# Altium PCB PX4FLOW2.0_X0.PcbDoc (part 2 of 2)
Units mm, origin at the board's own origin, x right, y up, seen from the top; angles counter-clockwise.
Board outline 45.39 x 35 mm, 6 copper layers (Top, Signal Layer 1, Signal Layer 2, Route2, Route15, Bottom), stack 1.474 mm thick; 104 components, 102 nets, 463 pads, 304 vias.
Unrouted connection lines stored in the file: 8.
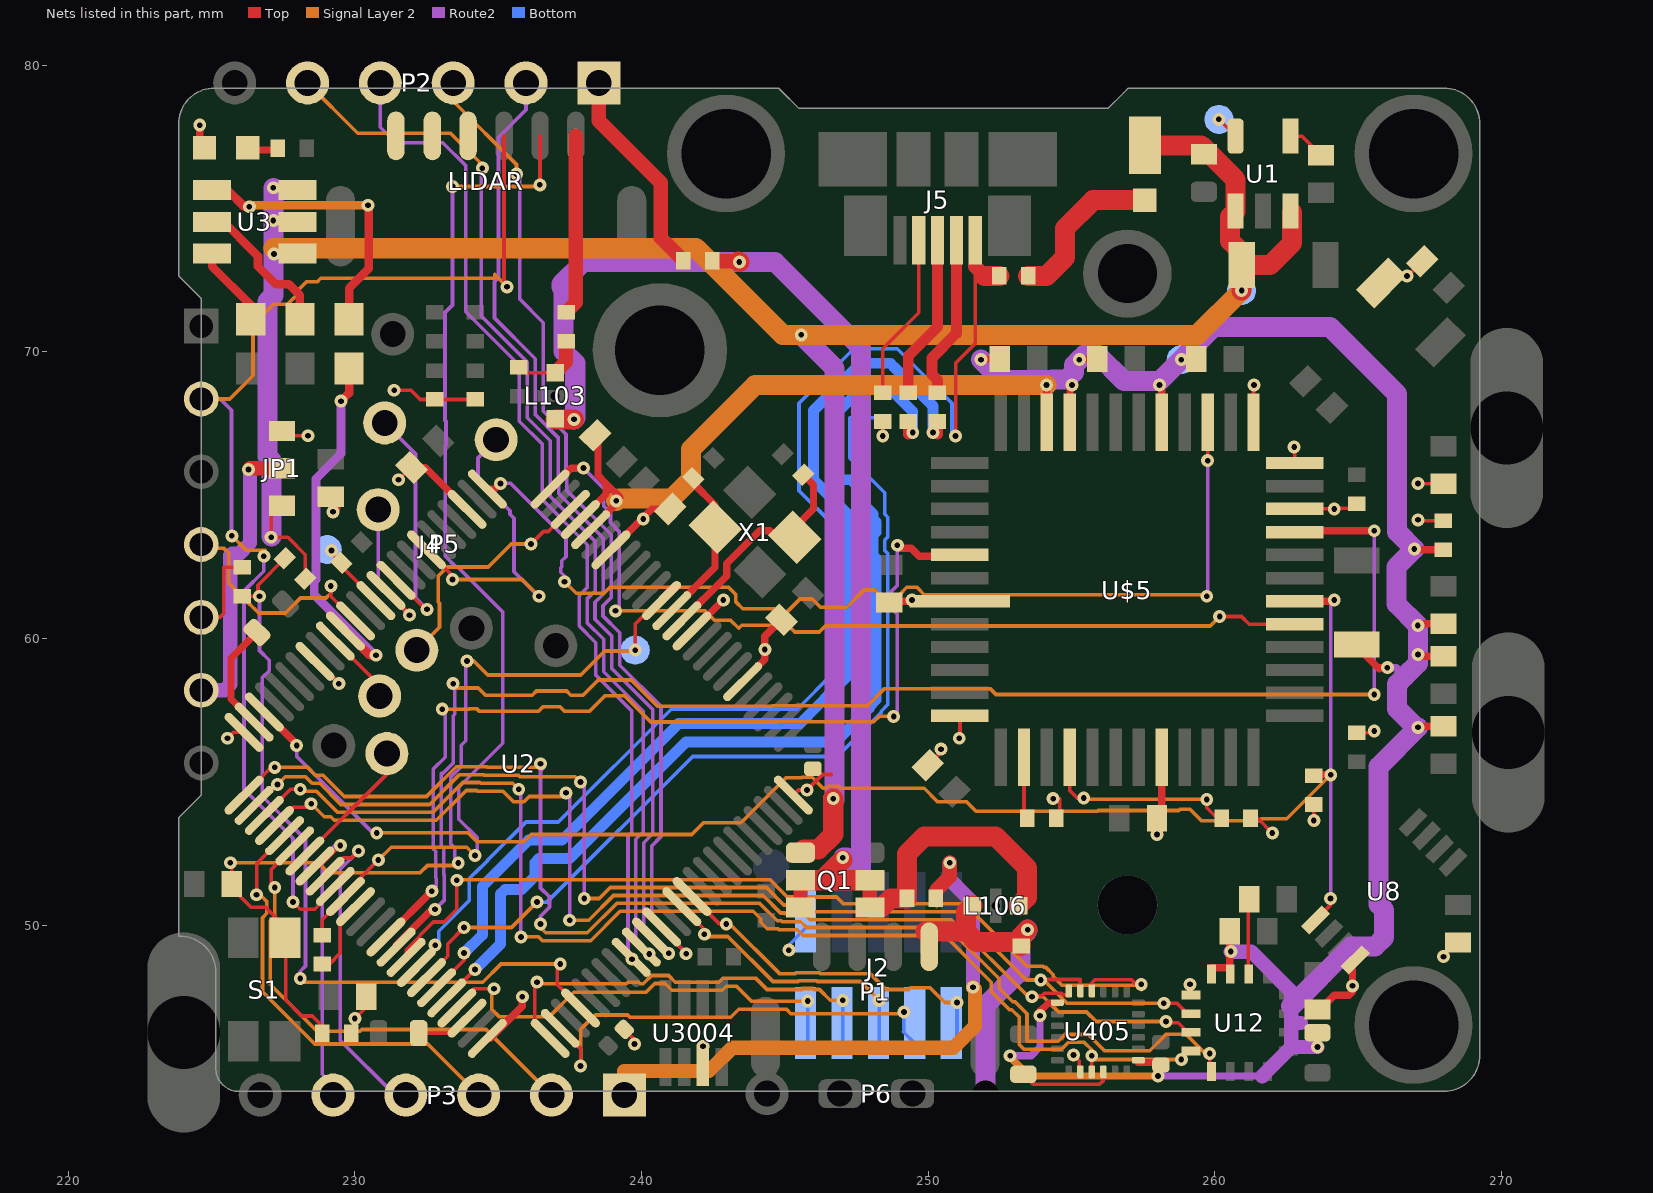
[diagram p6: the nets of this part, all layers, seen from the top]

## Via types
v1: diameter 0.45, hole 0.2, Top to Bottom, tented both sides, 304 vias

## Nets (pads, with @x,y where several pads share a name; then routed paths per layer and width w, separated by ;. In a path a pad name is that pad's centre, name@x,y a point inside that pad or via, vN(x,y) a via of type N, cw(c..) or ccw(c..) an arc to the next point about the centre after c; other vN are vias at no path point) (continued)
I2C2_SDA: R2.1 U2.48 U8.5 U$5.24 | length 55.1
  Top w0.127: U8.5@263.506,50.175 264.033,50.702 v1(264.033,50.927)
  Top w0.254: U2.48@226.838,57.429 227.965,56.302 v1(227.965,56.261) ; U$5.24@262.786,61.297 264.116,61.297 v1(264.16,61.341) ; R2.1@263.449,55.212 263.476,55.239 v1(264.039,55.239)
  Route2 w0.127: v1(227.965,56.261) 227.965,55.88 230.632,53.213 v1(230.759,53.213) ; v1(264.033,50.927) 264.039,50.933 v1(264.039,55.239) 264.039,61.22 v1(264.16,61.341)
  Signal Layer 2 w0.127: v1(230.759,53.213) 233.949,53.213 234.26,52.901 235.894,52.901 236.148,53.156 241.746,53.156 242.157,53.566 243.467,53.566 245.043,55.142 245.581,55.142 245.589,55.15 245.952,55.15 246.331,54.772 246.429,54.772 246.503,54.845 246.866,54.845 246.94,54.772 249.855,54.772 250.323,54.303 251.333,54.303 251.668,53.968 255.905,53.968 255.93,53.994 258.733,53.994 258.771,54.033 259.135,54.033 259.527,53.64 261.55,53.64 261.614,53.704 262.504,53.704 v1(264.039,55.239)
J\T\R\S\T\: J2.10 U2.90 | length 12.4
  Top w0.127: U2.90@241.758,50.994 242.714,50.038 v1(242.951,50.038)
  Signal Layer 2 w0.127: v1(242.951,50.038) 243.078,50.038 244.81,48.306 245.353,48.306 245.385,48.338 246.207,48.338 246.239,48.306 247.97,48.306 248.526,47.751 249.314,47.751 249.373,47.81 250.062,47.81 250.576,47.295 v1(251.003,47.295)
  Bottom w0.127: J2.10@250.825,45.847 251.003,46.025 v1(251.003,47.295)
JTCK-SWCLK: J2.4 U2.76 | length 15.1
  Top w0.127: v1(236.347,48.006) 236.278,47.937 236.278,46.575 U2.76@236.808,46.045
  Signal Layer 2 w0.127: v1(236.347,48.006) 236.405,47.948 239.469,47.948 239.524,48.004 239.895,48.004 239.95,47.948 240.053,47.948 240.343,48.239 240.936,48.239 241.169,48.006 242.701,48.006 242.832,48.137 243.988,48.137 244.373,47.752 245.582,47.752 245.614,47.784 245.977,47.784 246.01,47.752 246.202,47.752 246.583,47.371 v1(247.015,47.371)
  Bottom w0.127: J2.4@247.015,45.847 v1(247.015,47.371)
JTDI: J2.8 U2.77 | length 15.9
  Top w0.127: U2.77@237.162,46.398 237.871,45.689 v1(237.871,45.085)
  Signal Layer 2 w0.127: v1(237.871,45.085) 237.871,46.355 238.379,46.863 239.511,46.863 239.594,46.78 243.107,46.78 243.389,47.061 245.052,47.061 245.206,46.907 249.091,46.907 v1(249.149,46.965)
  Bottom w0.127: v1(249.149,46.965) 249.149,46.304 249.123,46.279 J2.8@249.555,45.847
JTDO: J2.6 U2.89 | length 9.9
  Top w0.127: U2.89@241.404,50.641 242.189,49.856 v1(242.189,49.677)
  Signal Layer 2 w0.127: v1(242.189,49.677) 242.267,49.599 243.009,49.599 244.579,48.029 245.467,48.029 245.499,48.061 246.092,48.061 246.124,48.029 247.627,48.029 v1(248.285,47.371)
  Bottom w0.127: J2.6@248.285,45.847 v1(248.285,47.371)
JTMS-SWDIO: J2.2 U2.72 | length 15.9
  Top w0.127: U2.72@233.555,47.105 234.024,47.575 234.024,47.662 234.14,47.777 v1(234.848,47.777)
  Signal Layer 2 w0.127: v1(234.848,47.777) 234.765,47.694 234.765,47.062 235.022,46.805 236.783,46.805 237.634,47.657 240.153,47.657 240.458,47.962 240.821,47.962 241.054,47.729 242.816,47.729 242.947,47.86 243.31,47.86 243.825,47.346 v1(245.796,47.346)
  Bottom w0.127: J2.2@245.745,45.847 245.796,45.898 v1(245.796,47.346)
M\P\U\_\C\S\: U2.67 U405.22 | length 31.5
  Top w0.127: U2.67@231.788,48.873 231.788,49.137 232.278,49.627 232.278,49.652 232.733,50.107 233.114,50.107 233.553,50.546 v1(233.553,51.562) ; U405.22@255.705,47.625 U405.22@255.705,47.701 255.705,47.984 255.814,48.093 257.088,48.093 257.226,47.955 v1@257.429,47.955
  Signal Layer 2 w0.127: v1(233.553,51.562) 233.575,51.584 244.467,51.584 245.077,50.975 246.807,50.975 247.04,50.742 251.264,50.742 253.441,48.565 254,48.565 254.044,48.521 254.105,48.521 254.362,48.264 254.362,48.202 254.663,47.902 257.279,47.902 257.429,47.752 v1(257.429,47.93)
MAG_DRDY---: P5.2 U2.36 | length 5.3
  Top w0.127: U2.36@231.08,61.672 231.902,60.85 v1(231.902,60.808)
  Route2 w0.127: P5.2@230.81,64.491 230.81,61.9 v1(231.902,60.808)
NetC3_P$1: C3.P$1 U2.12 X1.3 | length 8.2
  Top w0.254: U2.12@241.404,60.611 242.967,62.174 242.967,62.611 244.11,63.754 244.475,63.754 244.705,63.524 X1.3@245.343,63.524 245.343,63.86 245.999,64.516 245.999,65.354 C3.P$1@245.641,65.712
NetC4_P$2: C4.P$2 U2.13 X1.1 | length 5.6
  Top w0.254: U2.13@241.051,60.965 242.563,62.477 X1.1@242.563,63.88 242.563,64.65 241.804,65.409 C4.P$2@241.804,65.579
NetC11_P$1: C11.P$1 U2.73 | length 1.9
  Top w0.127: C11.P$1@232.221,46.228 233.385,46.228 U2.73@233.909,46.752
NetC12_P$1: C12.P$1 U2.49 | length 3.8
  Top w0.254: U2.49@226.484,57.076 225.679,57.881 225.679,59.309 C12.P$1@226.581,60.211
NetC13_1: C13.1 U1.4 | length 1.3
  Top w0.127: U1.4@262.636,77.521 263.032,77.521 C13.1@263.703,76.85
NetC25_1: C25.1 U12.14 | length 2.3
  Top w0.127: U12.14@261.158,48.512 C25.1@261.158,50.861
NetD1_ANODE: D1.ANODE L8.1 | length 5.8
  Top w0.7: L8.1@253.484,72.644 254.127,72.644 254.762,73.279 254.762,74.295 255.753,75.286 D1.ANODE@257.556,75.286
NetD104_C: D104.C L2.1 L103.P$2 | length 2.3
  Top w0.127: D104.C@235.907,69.266 L103.P$2@236.982,69.266
  Top w0.5: L103.P$2@236.982,69.266 237.363,69.647 L2.1@237.363,70.366
NetD108_C: D108.C L106.P$2 P1.1 P6.1 | length 11.3
  Top w0.127: D108.C@253.23,49.276 D108.C@253.238,49.268
  Top w0.7: P1.1@249.906,49.773 251.319,49.773 ; L106.P$2@251.536,50.673 251.319,50.455 251.319,49.773 ; D108.C@253.086,49.403 251.689,49.403 251.319,49.773 ; D108.C@253.238,49.268 253.238,49.606 v1(253.467,49.835)
  Route2 w0.7: P6.1@251.993,44.12 251.993,47.191 253.213,48.41 253.213,49.555 253.467,49.809 v1(253.467,49.835)
NetL2_2: L2.2 LIDAR.6 | length 6.3
  Top w0.5: L2.2@237.363,71.374 237.704,71.715 237.704,77.528
NetL3_2: L3.2 P2.1 | length 7.4
  Top w0.5: P2.1@238.506,79.375 238.506,78.054 240.665,75.895 240.665,73.965 L3.2@241.452,73.177
NetLED1_C: LED1.C R13.2 | length 0.7
  Top w0.254: LED1.C@226.39,77.038 227.051,77.038
NetR14_1: R14.1 U3.C3 | length 10
  Top w0.3: 225.017,75.641 225.552,75.641 226.136,75.057 v1(226.314,75.057) ; R14.1@229.794,71.132 229.794,72.212 230.48,72.898 230.48,75.082 v1(230.454,75.108)
  Signal Layer 2 w0.3: v1(226.314,75.057) 226.365,75.108 v1(230.454,75.108)
NetR15_1: R15.1 U3.C2 | length 5
  Top w0.3: U3.C2@225.271,74.678 226.619,73.33 226.619,72.974 227.234,72.359 227.692,72.359 228.079,71.971 R15.1@228.079,71.132
NetR17_1: R17.1 U3.C1 | length 2.9
  Top w0.3: 225.017,73.424 225.017,72.976 226.365,71.628 R17.1@226.365,71.132
NetR19_1: R19.1 U$5.8 | length 2.1
  Top w0.127: R19.1@253.34,53.761 U$5.8@253.34,55.857
NetR20_1: R20.1 U$5.10 | length 6.9
  Top w0.127: U$5.10@254.94,55.857 254.94,54.686 255.194,54.432 v1(255.422,54.432) ; v1(259.715,54.381) 259.715,54.087 R20.1@260.081,53.721
  Signal Layer 2 w0.127: v1(255.422,54.432) v1@255.473,54.432 ; v1@255.473,54.381 v1(259.715,54.381)
OTG_FS_ID: R7.2 U2.69 | length 33.5
  Top w0.127: U2.69@232.495,48.166 233.238,48.91 233.238,49.337 233.236,49.34 v1(233.807,49.911) ; v1(248.412,67.056) R7.2@248.412,67.564
  Signal Layer 2 w0.127: v1(233.807,49.911) 235.458,49.911 v1(236.347,50.8)
  Bottom w0.127: v1@236.22,50.8 v1(236.347,50.8) ; v1@236.347,50.658 v1(236.347,50.8) ; v1(248.412,67.056) 248.412,67.691 247.269,67.691 247.269,66.294 248.481,65.082 248.481,64.334 248.587,64.228 248.587,63.534 248.481,63.428 248.481,63.064 248.587,62.958 248.587,57.692 248.354,57.459 248.354,57.41 246.824,55.88 241.783,55.88 236.703,50.8 v1(236.347,50.8)
OTG_FS_N: R6.2 U2.70 | length 36.8
  Top w0.127: U2.70@232.848,47.812 233.807,48.771 v1(233.807,49.022)
  Top w0.381: v1(250.161,67.183) 250.253,67.183 250.317,67.12 R6.2@250.317,67.564
  Bottom w0.381: v1(233.807,49.022) 234.442,49.657 234.442,51.342 236.059,52.959 237.227,52.959 241.291,57.023 245.516,57.023 247.201,58.708 247.201,64.321 246.185,65.337 245.999,65.523 245.999,67.954 246.185,68.14 247.455,69.41 247.641,69.596 248.675,69.596 248.861,69.41 250.161,68.11 v1(250.161,67.183)
OTG_FS_P: R8.2 U2.71 | length 36.8
  Top w0.127: U2.71@233.202,47.459 v1(234.188,48.445)
  Top w0.381: R8.2@249.301,67.564 249.301,67.12 249.364,67.183 v1(249.457,67.183)
  Bottom w0.381: v1(234.188,48.445) 235.077,49.334 235.077,51.079 235.229,51.232 235.814,51.232 236.271,51.689 236.271,52.172 236.423,52.324 237.49,52.324 241.554,56.388 246.761,56.388 247.95,57.577 247.95,57.626 248.183,57.859 248.183,62.791 248.077,62.897 248.077,63.595 248.183,63.701 248.183,64.061 248.077,64.167 248.077,64.342 247.65,64.77 247.65,65.176 247.294,65.532 246.888,65.532 246.634,65.786 246.634,66.262 246.863,66.491 246.863,67.107 246.634,67.335 246.634,67.691 247.904,68.961 248.412,68.961 249.457,67.916 v1(249.457,67.183)
OTG_ID: J5.ID R7.1 | length 5.8
  Top w0.127: R7.1@248.412,68.572 248.412,70.104 249.667,71.359 J5.ID@249.667,73.889
OTG_N: J5.D- R6.1 | length 5.7
  Top w0.381: R6.1@250.317,68.572 250.317,69.017 250.131,69.202 250.131,69.782 250.977,70.628 J5.D-@250.977,73.889
OTG_P: J5.D+ R8.1 | length 5.7
  Top w0.381: R8.1@249.301,68.572 249.301,69.85 250.317,70.866 J5.D+@250.317,73.889
PB2-BOOT1: BOOT1.P$1 R5.1 U2.37 | length 3.2
  Top w0.127: v1(229.184,63.068) 229.184,63.217 229.18,63.221 229.053,63.094 229.485,62.662 229.462,62.638 R5.1@229.516,62.638 229.516,62.529 U2.37@230.727,61.318
  Bottom w0.127: BOOT1.P$1@229.032,63.068 229.184,63.221 v1(229.184,63.068)
POWER: LIDAR.5 R12.1 U2.61 | length 37.2
  Top w0.127: R12.1@228.854,49.649 228.854,50.182 U2.61@229.666,50.994 229.666,51.116 v1(230.817,52.266) ; v1(236.449,75.819) 236.454,75.825 236.454,77.528
  Route2 w0.127: v1(233.401,75.768) 233.401,71.628 233.14,71.367 233.14,67.603 233.174,67.569 233.174,66.746 233.151,66.724 233.151,62.86 233.521,62.491 233.582,62.491 235.154,60.919 235.154,56.34 233.622,54.809 233.622,53.692 234.264,53.05 234.264,52.502 v1(234.188,52.426)
  Signal Layer 2 w0.127: v1(230.817,52.266) 231.262,52.712 233.902,52.712 v1(234.188,52.426) ; v1(233.401,75.768) 233.407,75.761 236.391,75.761 v1(236.449,75.819)
PRES_DRDY---: P5.1 U2.35 | length 8.6
  Top w0.127: U2.35@231.434,62.025 232.449,61.011 v1(232.512,61.011)
  Route2 w0.127: P5.1@231.038,67.513 232.11,66.442 232.11,61.412 v1(232.512,61.011)
PWM: J4.PW LIDAR.4 U2.60 | length 41
  Top w0.127: v1(227.838,50.8) 228.092,50.546 228.6,50.546 228.854,50.8 228.854,50.889 U2.60@229.313,51.348 ; 235.204,77.528 235.197,77.521 235.197,72.371 v1(235.306,72.263)
  Route2 w0.127: J4.PW@224.638,68.351 225.298,68.351 225.692,67.958 v1@225.692,63.576 ; v1(226.822,62.865) 226.822,62.342 226.129,61.65 226.129,54.739 227.838,53.03 v1(227.838,50.8)
  Signal Layer 2 w0.127: J4.PW@224.917,68.351 225.628,68.351 226.441,69.164 226.441,70.942 227.148,71.649 227.64,71.649 227.97,71.979 227.97,72.1 228.303,72.434 228.68,72.434 228.807,72.561 234.874,72.561 234.874,72.695 v1(235.306,72.263) ; v1(225.704,63.576) 226.212,63.068 v1@226.822,63.068 ; v1(226.822,62.865) 226.873,62.916 v1@226.873,63.068
PWM_EN: R12.2 U2.62 | length 2.6
  Top w0.127: R12.2@228.854,48.641 229.108,48.641 229.489,49.022 229.489,50.11 U2.62@230.02,50.641
R\E\S\E\T\: !RESET.P1 C17.2 R16.1 S1.A1 U2.14 | length 32.3
  Top w0.127: v1(225.654,52.172) 225.704,52.121 C17.2@225.704,51.435 225.704,51.283 226.372,50.615 226.88,50.615 227.558,49.937 S1.A1@227.558,49.552 227.584,49.526 227.584,47.371 228.131,46.824 228.512,46.824 228.862,46.474 R16.1@228.862,46.228 ; v1(239.776,59.588) 239.776,60.503 240.591,61.318 U2.14@240.697,61.318
  Route2 w0.127: v1@233.604,52.163 233.604,52.222 233.477,52.349 233.477,52.697 233.345,52.828 233.345,55.164 233.705,55.524 233.705,56.272 233.865,56.431 233.865,59.251 v1(233.909,59.207)
  Signal Layer 2 w0.127: v1(225.654,52.172) 228.727,52.172 229.071,51.828 232.28,51.828 232.53,52.077 233.688,52.077 v1(233.603,52.162) ; v1(233.909,59.207) 234.148,59.207 234.636,58.719 237.878,58.719 238.714,59.556 239.744,59.556 v1(239.776,59.588)
RED_LED: R14.2 U2.40 | length 12.9
  Top w0.3: v1(229.514,68.275) 229.794,68.555 R14.2@229.794,69.418 ; U2.40@229.666,60.258 230.513,59.411 v1(230.734,59.411)
  Route2 w0.3: v1(229.514,68.275) 229.514,66.446 228.639,65.571 228.639,62.047 228.583,61.99 228.583,61.485 228.614,61.485 230.689,59.411 v1(230.734,59.411)
REGOUT: C34.P$1 U405.10 | length 3.2
  Top w0.127: C34.P$1@253.314,44.791 253.656,44.45 255.981,44.45 256.108,44.577 U405.10@256.108,44.803
SONAR_TX: J4.TX R11.1 | length 3.1
  Top w0.127: J4.TX@224.638,60.731 225.29,60.731 225.417,60.858 225.417,62.476 R11.1@226.06,62.476
SPI1_MOSI---: P5.4 U2.32 | length 11.4
  Top w0.127: U2.32@232.495,63.086 233.401,62.18 v1(233.401,62.052)
  Route2 w0.127: P5.4@234.925,66.929 234.29,66.294 234.29,65.572 235.407,64.455 235.407,64.329 235.547,64.19 235.547,62.319 236.398,61.468 v1(236.423,61.468) v1@236.347,61.544
  Signal Layer 2 w0.127: v1(233.401,62.052) 235.839,62.052 v1(236.423,61.468)
SPI2_MISO: U2.53 U12.4 U405.9 | length 43.2
  Top w0.127: U2.53@226.838,53.823 227.752,54.737 v1(228.092,54.737) ; v1(255.702,45.441) 255.705,45.437 U405.9@255.705,44.803 ; v1(258.826,45.312) U12.4@259.133,45.618
  Route2 w0.127: v1(235.712,54.737) 235.839,54.61 235.788,54.559 v1(235.788,49.581)
  Signal Layer 2 w0.127: v1(228.092,54.737) 228.161,54.668 228.655,54.668 229.393,53.929 232.724,53.929 233.765,54.97 234.357,54.97 234.382,54.945 235.504,54.945 v1(235.712,54.737) ; v1(235.788,49.581) 235.795,49.588 236.406,49.588 236.544,49.449 238.222,49.449 239.249,50.477 243.895,50.477 244.152,50.22 244.152,50.096 244.38,49.867 244.758,49.867 244.786,49.839 245.432,49.839 245.637,49.634 250.573,49.634 252.199,48.008 252.199,47.678 252.829,47.048 252.912,47.048 253.169,46.791 253.169,45.834 253.331,45.672 254.652,45.672 254.885,45.905 255.441,45.905 255.702,45.644 v1(255.702,45.441) 255.702,45.402 255.797,45.307 258.821,45.307 v1(258.826,45.312)
SPI2_MOSI: U2.54 U12.3 U405.24 | length 41.4
  Top w0.127: U2.54@227.191,53.469 227.824,54.102 228.346,54.102 v1(228.473,54.229) ; v1(253.619,47.498) 253.651,47.53 253.957,47.53 254.049,47.623 254.644,47.623 254.694,47.573 254.768,47.573 254.81,47.53 U405.24@254.905,47.625 ; v1(258.293,46.634) 258.341,46.586 258.722,46.586 259.124,46.184 U12.3@259.133,46.184
  Route2 w0.127: v1(237.363,54.61) 237.49,54.483 v1(237.49,50.165)
  Signal Layer 2 w0.127: v1(228.473,54.229) 228.925,53.777 228.926,53.779 229.152,53.779 229.278,53.652 232.838,53.652 233.879,54.693 234.243,54.693 234.268,54.668 235.161,54.668 235.53,54.298 235.894,54.298 236.078,54.483 237.236,54.483 v1(237.363,54.61) ; v1(237.49,50.165) 238.154,50.165 239.02,51.03 244.238,51.03 244.847,50.421 244.988,50.421 245.016,50.393 245.661,50.393 245.866,50.188 250.802,50.188 253.492,47.498 v1(253.619,47.498) 254.011,47.498 254.542,46.967 255.522,46.967 255.854,46.634 v1(258.293,46.634)
SPI2_NSS: U2.51 U12.5 | length 46
  Top w0.127: U2.51@226.131,54.53 226.822,55.221 226.822,55.245 227.076,55.499 v1(227.203,55.499) ; v1(259.817,45.517) 259.817,45.071 U12.5@259.858,45.112
  Route2 w0.127: v1(236.474,50.038) 236.474,50.307 236.786,50.618 236.786,50.982 236.474,51.293 236.474,55.372 236.601,55.499 v1(236.474,55.626)
  Signal Layer 2 w0.127: v1(227.203,55.499) 228.342,55.499 228.619,55.221 228.884,55.221 229.623,54.483 232.494,54.483 233.535,55.524 234.587,55.524 234.612,55.499 236.347,55.499 v1(236.474,55.626) ; v1(236.474,50.038) 236.474,49.911 236.659,49.726 238.108,49.726 239.135,50.754 244.123,50.754 244.733,50.144 244.873,50.144 244.901,50.116 245.547,50.116 245.752,49.911 250.687,49.911 252.476,48.122 252.476,47.792 252.944,47.325 253.026,47.325 253.446,46.905 253.446,45.949 254.538,45.949 254.77,46.182 255.581,46.182 256.144,45.618 257.723,45.618 258.289,46.184 258.997,46.184 v1@259.817,45.364 ; v1@259.817,45.314 v1(259.817,45.517)
SPI2_SCK: U2.52 U12.2 U405.23 | length 40.6
  Top w0.127: v1@253.873,48.184 253.959,48.098 254.825,48.098 255.305,48.097 U405.23@255.305,47.701 U405.23@255.305,47.625 ; v1(258.216,47.269) 258.674,47.269 U12.2@258.969,46.974
  Route2 w0.127: v1(237.871,54.991) 237.998,54.864 v1(237.998,50.927)
  Signal Layer 2 w0.127: v1(227.294,54.899) 227.57,55.176 228.274,55.176 228.505,54.945 228.769,54.945 229.508,54.206 232.609,54.206 233.65,55.247 234.472,55.247 234.497,55.222 235.712,55.222 235.758,55.176 237.686,55.176 v1(237.871,54.991) ; v1(237.998,50.927) 238.525,50.927 238.905,51.307 244.353,51.307 244.962,50.698 245.102,50.698 245.13,50.67 245.776,50.67 245.981,50.465 251.033,50.465 253.416,48.082 v1(253.924,48.082) 254.025,48.082 254.838,47.269 v1(258.216,47.269)
TIM5_CH1: P5.7 U2.23 | length 8.5
  Top w0.127: v1(236.144,63.292) 236.58,63.729 236.744,63.729 U2.23@237.515,64.5
  Signal Layer 2 w0.127: P5.7@232.156,59.588 232.95,60.383 232.95,61.222 232.911,61.261 232.911,62.183 233.219,62.491 234.654,62.491 235.456,63.292 v1(236.144,63.292)
TIM5_CH3_EXPOSURE: U2.25 U$5.23 | length 31.8
  Top w0.127: v1(260.166,60.763) 260.927,60.764 261.194,60.497 U$5.23@262.786,60.497
  Top w0.254: U2.25@236.808,65.207 237.539,65.938 v1(237.973,65.938)
  Route2 w0.127: v1(237.973,65.938) 238.806,65.105 238.677,64.977 238.677,64.614 238.912,64.378 238.912,64.028 239.214,63.727 239.214,60.836 v1(239.09,60.96)
  Signal Layer 2 w0.127: v1(239.09,60.96) 242.22,60.96 242.554,60.625 243.108,60.625 243.385,60.349 243.493,60.456 244.594,60.456 244.701,60.349 245.209,60.349 245.339,60.219 246.194,60.219 246.404,60.429 259.831,60.429 v1(260.166,60.763)
TIM5_CH4_STANDBY: U2.26 U$5.33 | length 35.5
  Top w0.127: v1(259.746,66.198) U$5.33@259.746,67.539
  Top w0.254: U2.26@234.616,65.207 234.879,65.207 v1(235.077,65.405)
  Route2 w0.127: v1(235.077,65.405) 235.433,65.405 237.363,63.475 237.363,62.85 237.217,62.704 237.217,62.506 237.178,62.467 237.178,62.302 237.363,62.118 237.312,62.067 v1(237.312,61.976) ; v1(259.715,61.468) 259.746,61.437 v1(259.746,66.198)
  Signal Layer 2 w0.127: v1(237.312,61.976) 237.719,61.57 238.688,61.57 238.898,61.78 243.032,61.78 243.289,61.523 243.289,61.272 243.531,61.029 244.804,61.029 244.931,60.902 245.052,60.902 245.523,61.373 245.952,61.373 246.238,61.087 247.157,61.087 247.758,61.688 248.121,61.688 248.284,61.526 248.992,61.526 249.246,61.78 249.61,61.78 249.864,61.526 259.657,61.526 v1(259.715,61.468)
TIM8_CH3_MASTERCLOCK: U2.65 U$5.47 | length 34.1
  Top w0.254: U2.65@231.08,49.58 v1(232.681,51.181) ; v1(248.92,63.246) 249.023,63.143 249.404,63.143 249.682,62.865 251.054,62.865 U$5.47@251.104,62.916
  Route2 w0.127: v1(232.681,51.181) 232.837,51.337 232.837,51.629 232.821,51.646 232.821,52.57 232.735,52.655 232.735,55.439 233.151,55.855 233.151,57.425 v1(233.045,57.531) ; v1(248.793,57.277) 248.92,57.404 248.92,60.837 248.712,61.045 248.712,61.637 248.92,61.845 v1(248.92,63.246)
  Signal Layer 2 w0.127: v1(233.045,57.531) 233.991,57.531 234.01,57.549 234.239,57.549 234.326,57.462 236.409,57.462 236.559,57.612 237.151,57.612 237.301,57.462 238.187,57.462 238.718,57.993 239.409,57.993 240.321,57.081 244.778,57.081 244.786,57.089 248.101,57.089 248.289,57.277 v1(248.793,57.277)
TIM8_CH4_LED_OUT: U2.66 U$5.27 | length 52.1
  Top w0.254: U2.66@231.434,49.227 231.434,49.29 232.69,50.546 v1(232.791,50.546) ; U$5.27@262.837,63.754 v1(265.557,63.754)
  Route2 w0.127: v1(232.791,50.546) 233.12,50.875 233.12,51.375 233.114,51.38 233.114,51.744 233.098,51.76 233.098,52.684 233.012,52.77 233.012,55.286 233.063,55.286 233.428,55.651 233.428,57.294 233.484,57.349 233.484,58.362 v1(233.426,58.42) ; v1(265.557,58.039) v1(265.557,63.754)
  Signal Layer 2 w0.127: v1(233.426,58.42) 233.426,58.267 234.304,58.267 234.556,58.016 236.18,58.016 236.329,58.165 237.381,58.165 237.53,58.016 237.958,58.016 238.488,58.546 239.639,58.546 240.55,57.635 244.548,57.635 244.556,57.643 247.871,57.643 248.475,58.247 252.152,58.247 252.36,58.039 v1(265.557,58.039)
UART4_RX: R10.2 R11.2 U2.79 | length 28.1
  Top w0.127: R11.2@226.06,61.468 v1(226.67,61.468) 226.619,61.519 226.619,61.856 R10.2@227.555,62.792 ; v1(237.16,48.641) 237.261,48.641 237.062,48.441 237.062,47.912 U2.79@237.869,47.105
  Route2 w0.127: v1(226.67,61.468) 226.67,59.574 227.007,59.237 227.007,58.873 226.764,58.631 226.764,54.496 228.277,52.984 228.277,48.572 228.092,48.387 v1(228.092,48.133)
  Signal Layer 2 w0.127: v1(228.092,48.133) 228.218,48.007 234.458,48.007 235.092,48.641 v1(237.16,48.641)
US_EN1: J4.RX U2.39 | length 8.2
  Top w0.127: v1(229.159,61.824) 229.159,61.472 U2.39@230.02,60.611
  Signal Layer 2 w0.127: J4.RX@224.638,63.271 224.771,63.138 225.432,63.138 225.603,62.967 225.603,61.925 226.231,61.297 226.231,61.286 226.488,61.029 226.499,61.029 226.644,60.884 227.579,60.884 228.102,61.407 228.992,61.407 229.159,61.574 v1(229.159,61.824)
US_EN2: P5.8 U2.41 | length 2.6
  Top w0.127: U2.41@229.313,59.904 230.861,58.356 P5.8@230.861,57.988
USART2_CTS: P2.4 U2.84 | length 35.7
  Top w0.127: U2.84@239.636,48.873 239.7,48.809 v1(239.665,48.809)
  Route2 w0.127: P2.4@230.886,79.375 230.886,77.826 231.419,77.292 233.065,77.292 233.865,76.493 233.865,71.393 235.734,69.523 235.734,67.576 236.532,66.779 236.532,64.842 238.106,63.268 238.106,61.771 237.821,61.486 237.821,60.434 238.404,59.85 238.404,58.718 239.657,57.465 239.657,53.239 239.523,53.104 239.523,48.987 239.7,48.809 v1(239.665,48.809)
USART2_RTS: P2.5 U2.85 | length 38.5
  Top w0.127: U2.85@239.99,49.227 240.265,48.952 v1(240.265,48.987)
  Route2 w0.127: v1(234.442,76.403) 234.442,76.517 234.403,76.556 234.403,71.246 236.011,69.638 236.011,67.691 236.809,66.894 236.809,65.395 236.816,65.387 236.816,64.949 238.383,63.382 238.383,61.657 238.098,61.371 238.098,60.549 238.681,59.965 238.681,58.833 240.055,57.459 240.055,53.245 239.8,52.989 239.8,49.506 240.265,49.041 v1(240.265,48.987) v1@240.319,48.987
  Signal Layer 2 w0.127: P2.5@228.346,79.375 230.099,77.622 233.336,77.622 234.442,76.517 v1(234.442,76.403)
USART2_RX: P2.3 U2.87 | length 35.6
  Top w0.127: U2.87@240.697,49.934 240.697,49.879 241.125,49.451 241.128,49.451 241.554,49.025 v1(241.554,48.997)
  Route2 w0.127: v1(235.636,76.2) 235.744,76.092 235.744,71.835 236.565,71.014 236.565,67.92 237.362,67.123 237.362,65.625 237.388,65.599 237.388,65.161 238.937,63.612 238.937,61.427 238.652,61.142 238.652,60.778 239.235,60.195 239.235,59.062 240.678,57.62 240.678,53.084 240.353,52.76 240.353,50.197 241.1,49.451 241.128,49.451 241.554,49.025 v1(241.554,48.997)
  Signal Layer 2 w0.127: P2.3@233.426,79.375 233.426,78.74 235.636,76.53 v1(235.636,76.2)
USART2_TX: P2.2 U2.86 | length 34.9
  Top w0.127: U2.86@240.344,49.58 240.978,48.946 240.978,48.981 v1(240.947,49.012)
  Route2 w0.127: P2.2@235.966,79.375 235.966,78.435 235.007,77.476 235.007,72.585 234.867,72.445 234.867,71.174 236.288,69.752 236.288,67.806 237.085,67.008 237.085,65.51 237.111,65.484 237.111,65.046 238.66,63.497 238.66,61.542 238.375,61.256 238.375,60.664 238.958,60.08 238.958,58.947 240.382,57.524 240.382,53.18 240.076,52.874 240.076,49.883 v1(240.947,49.012)
  Signal Layer 2 w0.127: v1(240.947,49.012) v1@241.013,48.946
USART3_CK: P5.3 U2.57 | length 4.8
  Top w0.127: U2.57@228.252,52.409 231.115,55.271 P5.3@231.115,55.982
USART3_CTS: P3.5 U2.58 | length 10.4
  Top w0.127: U2.58@228.606,52.055 228.77,52.055 v1(229.489,52.775)
  Route2 w0.127: P3.5@229.235,44.069 229.235,44.414 228.854,44.795 228.854,52.324 229.305,52.775 v1(229.489,52.775)
USART3_RTS: P3.4 U2.59 | length 11.5
  Top w0.127: U2.59@228.959,51.702 229.594,52.336 229.882,52.336 v1(230.124,52.578)
  Route2 w0.127: v1(230.124,52.578) 229.489,51.943 229.489,45.974 231.394,44.069 P3.4@231.775,44.069
USART3_RX: P3.2 U2.56 | length 16.7
  Top w0.127: v1(227.203,51.308) 227.076,51.435 227.076,51.94 U2.56@227.898,52.762
  Signal Layer 2 w0.127: v1(227.203,51.308) 227.203,50.292 227.051,50.14 227.051,47.919 228.672,46.297 230.179,46.297 230.236,46.355 234.569,46.355 P3.2@236.855,44.069
USART3_TX: P3.3 U2.55 | length 15.3
  Top w0.127: v1(226.568,51.054) 226.568,52.139 U2.55@227.545,53.116
  Route2 w0.127: P3.3@234.188,44.069 P3.3@234.315,44.069
  Signal Layer 2 w0.127: v1(226.568,51.054) 226.695,51.054 226.926,50.823 226.926,50.407 226.774,50.254 226.774,47.673 228.6,45.847 232.537,45.847 P3.3@234.315,44.069
VBUS: J5.VBUS L8.2 U2.68 | length 45.8
  Top w0.127: U2.68@232.141,48.52 232.852,49.23 232.852,49.242 v1(232.797,49.296) ; v1(250.952,67.056) 250.952,69.596 251.638,70.282 251.638,72.644 251.638,72.974 J5.VBUS@251.638,73.889
  Top w0.5: 251.638,72.974 251.968,72.644
  Top w0.7: 251.968,72.644 L8.2@252.476,72.644
  Bottom w0.127: v1(232.797,49.296) 232.918,49.417 232.918,49.784 233.992,50.858 233.992,51.62 234.359,51.987 234.37,51.987 234.627,52.244 234.627,52.255 235.966,53.594 237.094,53.594 241.031,57.531 245.425,57.531 246.692,58.797 246.692,63.95 245.491,65.151 245.491,68.199 247.396,70.104 248.92,70.104 250.825,68.199 250.825,67.056 v1(250.952,67.056)
VCC: C2.1 C5.1 C8.1 C9.1 C10.1 C14.P$1 C16.1 C18.1 C28.1 C29.1 C30.1 C31.1 C32.1 C35.1 C3004.P$1 J2.1 JP1.3 L11.1 LED1.A R1.1 R2.2 R9.2 R16.2 R19.2 R20.2 R3002.1 R3004.1 U1.5 U2.6 U2.11 U2.19 U2.28 U2.43 U2.50 U2.75 U2.100 U8.8 U12.1 U405.8 U3004.3 U$5.1 U$5.6 U$5.14 U$5.28 U$5.30 U$5.31 VDD_3V3.P$1 | length 46.1
  Top w0.127: v1(225.552,56.515) 225.759,56.722 U2.50@226.131,56.722 ; JP1.3@227.457,67.234 227.624,67.067 v1(228.364,67.067) ; U2.43@228.606,59.197 228.659,59.25 229.438,58.471 v1(229.438,58.42) ; v1(229.997,46.736) 230.393,47.132 C28.1@230.393,47.498 ; v1(231.369,68.656) 231.953,68.656 232.283,68.326 232.291,68.334 R3004.1@232.791,68.334 R3002.1@234.188,68.334 ; v1(231.521,65.532) 231.95,65.961 C5.1@231.976,65.961 ; C3004.P$1@239.497,46.253 239.751,45.999 v1(239.751,45.847) ; U3004.3@242.138,45.053 v1(242.138,45.771) ; U2.100@245.293,54.53 245.475,54.712 v1(245.77,54.712) 246.31,55.251 246.609,55.251 ; C2.1@248.641,61.25 248.732,61.341 v1(249.428,61.341) ; C16.1@249.984,55.577 250.444,56.037 v1(250.444,56.134) ; v1(251.079,56.515) 251.104,56.54 U$5.6@251.104,57.297 ; v1(254.356,54.407) 254.584,54.407 254.584,53.721 R19.2@254.61,53.721 ; v1(255.067,45.466) 255.263,45.27 255.263,44.921 U405.8@255.305,44.879 ; v1(260.137,78.105) U1.5@260.721,77.521 ; U$5.31@261.346,67.539 261.346,68.814 v1(261.366,68.834) ; R20.2@261.391,53.721 261.493,53.721 v1(262.001,53.213) ; v1(262.763,66.675) 262.786,66.652 U$5.30@262.786,66.116 ; U$5.28@262.786,64.516 v1(264.16,64.516) ; v1(263.449,53.645) R2.2@263.449,54.204 ; v1@264.185,64.541 R9.2@264.948,64.541 ; R1.1@264.947,56.71 265.498,56.71 v1(265.557,56.769) ; v1(266.7,72.644) 266.7,72.623 C31.1@267.231,73.154 ; v1(267.081,64.135) 267.114,64.102 L11.1@267.97,64.102 ; v1(267.081,65.405) 267.096,65.39 C32.1@267.97,65.39
  Top w0.254: LED1.A@224.587,77.279 v1(224.587,77.902) ; v1(229.235,64.414) 229.362,64.541 C8.1@229.362,65.009 ; C5.1@231.976,65.961 232.448,65.961 U2.28@233.909,64.5 ; U2.75@234.616,46.045 234.715,46.045 235.839,47.169 v1(235.839,47.498) ; U2.19@238.929,63.086 240.357,64.514 C10.1@240.998,64.514 ; v1(240.057,64.16) v1@240.057,64.213 ; U2.11@241.758,60.258 241.758,60.248 v1(242.851,61.341) ; U2.6@243.526,58.49 244.297,59.261 244.297,60.071 C9.1@244.879,60.653 ; C2.1@248.687,61.297 U$5.1@251.104,61.297 ; v1(257.977,53.156) C18.1@257.977,53.721 258.146,53.89 U$5.14@258.146,55.857 ; U12.1@259.08,47.549 259.131,47.6 v1(259.131,47.93) ; C30.1@263.627,47.219 263.83,47.219 264.159,47.548 264.668,47.548 264.795,47.675 v1(264.795,47.879) 264.795,48.43 264.668,48.557 U8.8@264.896,48.785
  Route2 w0.127: v1@240.069,64.148 v1(240.057,64.16) 240.057,64.135 v1@240.144,64.047 ; v1@264.668,47.879 v1(264.795,47.879)
  Signal Layer 2 w0.254: v1(257.977,53.156) v1@258.022,53.111
  Bottom w0.127: v1(245.135,49.124) 245.135,49.251 245.11,49.276 J2.1@245.745,49.911
  other v1: 267.97,48.895 244.297,59.614
VDD_3V3_ANALOG: C15.1 C19.1 C20.1 C21.1 C22.1 C23.1 C24.1 C26.1 C27.P$1 C33.P$1 C36.P$1 L11.2 U2.21 U2.22 U12.15 U12.16 U405.1 U405.13 U$5.35 U$5.39 U$5.40 VDD_3V3_ANALOG.P$1 | length 100.3
  Top w0.254: U2.22@237.869,64.147 238.76,65.038 238.76,65.405 ; U2.21@238.222,63.793 v1@239.17,64.741 ; C15.1@238.351,67.084 C15.1@238.376,67.084 238.475,66.985 238.475,65.69 238.76,65.405 ; v1@239.243,64.922 238.76,65.405 ; v1(251.841,69.723) 251.866,69.748 C20.1@252.486,69.748 ; v1@253.898,47.018 v1(253.898,46.838) 253.898,46.99 254.19,47.282 U405.1@254.503,47.282 ; U$5.40@254.127,67.539 v1(254.127,68.834) ; U$5.39@254.94,67.539 254.94,68.758 v1(255.016,68.834) ; v1(255.27,69.723) 255.295,69.748 C22.1@255.89,69.748 ; U405.13@257.327,45.203 258.029,45.203 258.013,45.187 v1(258.013,44.729) ; v1(258.064,68.834) 258.146,68.752 U$5.35@258.146,67.539 ; U12.16@259.858,48.512 260.424,48.512 U12.15@260.513,48.601 ; U12.15@260.508,48.512 260.513,48.517 U12.15@260.513,48.601 ; C21.1@260.513,49.784 U12.15@260.513,48.601 ; v1(263.576,45.745) C27.P$1@263.576,46.242 ; C36.P$1@264.947,59.789 264.947,59.715 265.735,58.928 265.786,58.979 v1(266.014,58.979) ; v1(266.954,63.119) 266.979,63.094 L11.2@267.97,63.094 ; v1(267.076,60.452) 267.015,60.513 C24.1@267.97,60.513 ; v1(267.081,56.896) 267.121,56.936 C23.1@267.97,56.936 ; v1(267.081,59.436) 267.142,59.375 C26.1@267.97,59.375
  Route2 w0.254: v1(252.857,45.441) 253.594,45.441 253.898,45.745 v1(253.898,46.838) ; v1(258.013,44.729) 261.645,44.729 ; v1(266.014,58.979) 266.321,58.979 266.626,58.674
  Route2 w0.5: v1(260.553,49.073) 261.264,49.073 262.661,47.676 262.661,47.168 262.661,46.584 ; 261.645,44.729 262.661,45.745 ; 262.992,46.584 262.661,46.584 ; v1(263.576,45.745) 262.661,45.745 ; 262.661,45.745 262.661,46.584
  Route2 w0.7: v1(251.841,69.723) 252.552,69.012 254.305,69.012 254.316,69.023 254.824,69.023 255.081,69.28 255.081,69.534 v1(255.27,69.723) 255.448,69.901 255.905,69.901 256.835,68.97 258.064,68.97 259.96,70.866 264.008,70.866 266.344,68.529 266.344,64.567 266.356,64.555 266.356,63.717 v1(266.954,63.119) 266.331,62.496 266.331,61.198 v1(267.076,60.452) 267.081,60.447 v1(267.081,59.436) 267.081,59.129 266.626,58.674 266.356,58.404 266.356,57.545 267.005,56.896 v1(267.081,56.896) 265.709,55.524 265.709,50.722 265.901,50.53 265.901,49.569 265.582,49.251 264.744,49.251 262.661,47.168
  Signal Layer 2 w0.254: v1(252.857,45.441) 252.857,45.39 253.517,44.729 v1(258.013,44.729)
  Signal Layer 2 w0.7: v1(239.116,64.795) 239.205,64.885 241.059,64.885 241.72,65.546 241.72,66.597 243.958,68.834 v1(254.127,68.834)
  other v1: 258.826,69.723
VDD_5V: C6.P$1 C7.2 D1.CATHODE JP1.1 Q1.4 R10.1 U1.1 U1.3 U3.A1 U3.A2 U3.A3 VDD_5V.P$1 | length 82.3
  Top w0.127: JP1.1@227.457,64.628 227.076,64.247 v1(227.076,63.525) 227.66,63.525 228.268,62.918 R10.1@228.268,62.08 ; D1.CATHODE@257.556,77.196 D1.CATHODE@257.866,76.886
  Top w0.7: Q1.4@245.542,52.527 245.655,52.64 246.172,52.64 246.685,53.153 v1(246.685,54.407) ; D1.CATHODE@257.556,77.196 259.52,77.196 260.721,75.995 U1.1@260.721,74.9 260.528,74.707 260.528,73.863 260.932,73.459 C6.P$1@260.932,73.025 ; v1(260.932,72.134) C6.P$1@260.932,73.025 ; U1.3@262.687,74.849 262.687,73.787 261.925,73.025 C6.P$1@260.932,73.025
  Route2 w0.7: v1@227.089,63.551 227.089,66.198 226.949,66.339 226.949,68.585 226.949,71.755 227.152,71.958 v1(227.152,75.717) ; v1(245.567,70.587) 246.736,69.418 246.736,54.356 v1(246.685,54.407)
  Signal Layer 2 w0.7: v1@227.152,73.609 241.9,73.609 244.923,70.587 v1(245.567,70.587) 259.385,70.587 v1(260.932,72.134)
  other v1: 227.178,73.406 227.152,74.574
VDD_5V_IN: L1.1 L3.1 L103.P$1 L106.P$1 Q1.1 Q1.2 Q1.5 Q1.6 | length 52
  Top w0.127: Q1.2@247.665,51.562 Q1.2@247.961,51.266 ; Q1.1@247.961,50.612 Q1.1@248.377,50.612
  Top w0.5: L3.1@242.486,73.152 v1@243.383,73.152 ; Q1.6@245.542,50.612 Q1.5@245.542,51.562 ; Q1.1@247.961,50.612 Q1.2@247.961,51.266
  Top w0.7: L103.P$1@236.995,67.64 v1(237.642,67.64) ; v1@243.383,73.152 v1(243.408,73.127) ; Q1.5@245.542,51.562 246.405,51.562 ; v1@247.003,52.269 246.405,51.671 246.405,51.562 ; Q1.2@247.665,51.562 246.405,51.562 ; Q1.1@248.377,50.612 248.691,50.927 L1.1@249.258,50.927 249.258,52.484 249.86,53.086 252.349,53.086 253.441,51.994 253.441,50.965 L106.P$1@253.149,50.673
  Route2 w0.7: v1(237.642,67.64) 237.685,67.683 237.685,69.597 237.275,70.007 237.275,72.182 237.199,72.259 237.199,72.353 237.973,73.127 v1(243.408,73.127) 244.653,73.127 247.65,70.129 247.65,51.867 247.167,52.349 v1@247.04,52.349
  other v1: 247.015,52.349
VDD_5V_IN_UART3: L1.2 P3.1 | length 22.6
  Top w0.127: P3.1@238.793,44.671 P3.1@239.395,44.069 ; L1.2@250.292,50.648 250.292,51.232
  Top w0.5: 250.292,51.232 250.749,51.689 v1(250.749,52.172)
  Route2 w0.127: P3.1@239.229,44.235 P3.1@239.395,44.069
  Route2 w0.5: v1(250.749,52.172) 250.749,51.587 251.562,50.775 v1(251.562,47.828)
  Signal Layer 2 w0.5: P3.1@239.395,44.069 239.395,44.907 242.348,44.907 243.161,45.72 247.44,45.72 ; 247.421,45.72 250.876,45.72 251.628,46.472 251.628,47.762 v1(251.562,47.828)
VDD_SONAR: J4.VDD JP1.2 | length 10.3
  Top w0.127: v1(226.289,65.888) v1@226.339,65.938
  Top w0.5: v1@226.339,65.938 JP1.2@227.457,65.938
  Route2 w0.127: v1(226.289,65.888) v1@226.339,65.888
  Route2 w0.5: J4.VDD@224.638,58.191 225.45,58.191 225.654,58.395 225.654,62.89 225.714,62.951 225.963,62.951 226.339,63.327 v1@226.339,65.888
pads on no net: J2.7 J4.BW J4.P$1 J5.GND5 J5.GND6 S1.A2 S1.B4 U2.1 U2.2 U2.7 U2.8 U2.9 U2.24 U2.38 U2.83 U2.88 U2.91 U12.6 U12.7 U405.2 U405.3 U405.4 U405.5 U405.6 U405.7 U405.12 U405.14 U405.15 U405.16 U405.17 U405.19 U405.21 U$5.2 U$5.3 U$5.4 U$5.5 U$5.22 U$5.26 U$5.36 U$5.37 U$8.P$1 U$8.P$2

## Polygon pours and split planes (outlines as drawn)
GND on Top "GND_L01_P018" (solid, remove dead copper, pour order 18): 223.901,49.606 cw(c223.901,48.362) 225.146,48.362 225.146,45.009 ccw(c225.946,44.996) 225.933,44.196 267.995,44.196 ccw(c267.983,45.453) 269.24,45.466 269.24,77.953 ccw(c267.995,77.953) 267.995,79.197 255.549,79.197 cw(c254.444,79.21) 254.432,78.105 246.05,78.105 cw(c246.037,79.21) 244.932,79.197 225.095,79.197 ccw(c225.095,77.953) 223.85,77.953 223.85,49.606
VCC on Route15 "VCC_L05_P020" (solid, remove dead copper, pour order 20): 223.901,49.606 cw(c223.901,48.362) 225.146,48.362 225.146,45.009 ccw(c225.946,44.996) 225.933,44.196 267.995,44.196 ccw(c267.983,45.453) 269.24,45.466 269.24,77.953 ccw(c267.995,77.953) 267.995,79.197 255.549,79.197 cw(c254.444,79.21) 254.432,78.105 246.05,78.105 cw(c246.037,79.21) 244.932,79.197 225.095,79.197 ccw(c225.095,77.953) 223.85,77.953 223.85,49.606
GND on Signal Layer 1 "GND_L02_P022" (solid, remove dead copper, pour order 22): 223.901,49.606 cw(c223.901,48.362) 225.146,48.362 225.146,45.009 ccw(c225.946,44.996) 225.933,44.196 267.995,44.196 ccw(c267.983,45.453) 269.24,45.466 269.24,77.953 ccw(c267.995,77.953) 267.995,79.197 255.549,79.197 cw(c254.444,79.21) 254.432,78.105 246.05,78.105 cw(c246.037,79.21) 244.932,79.197 225.095,79.197 ccw(c225.095,77.953) 223.85,77.953 223.85,49.606
GND on Bottom "GND_L06_P024" (solid, remove dead copper, pour order 24): 223.901,49.606 cw(c223.901,48.362) 225.146,48.362 225.146,45.009 ccw(c225.946,44.996) 225.933,44.196 267.995,44.196 ccw(c267.983,45.453) 269.24,45.466 269.24,77.953 ccw(c267.995,77.953) 267.995,79.197 255.549,79.197 cw(c254.444,79.21) 254.432,78.105 246.05,78.105 cw(c246.037,79.21) 244.932,79.197 225.095,79.197 ccw(c225.095,77.953) 223.85,77.953 223.85,49.606

## Keep-outs
Keep-Out Layer:
  lines w0.01: 223.85,51.029 223.85,53.696 224.638,54.483 ; 224.612,54.483 224.612,54.788 ; 224.638,56.464 224.638,57.379 ; 224.638,59.004 224.638,59.919 ; 224.638,61.544 224.638,62.459 ; 224.638,64.084 224.638,64.999 ; 224.638,66.624 224.638,67.539 ; 224.638,69.164 224.638,70.079 ; 224.638,71.628 224.638,71.857 223.85,72.644 223.85,77.953 cw(c225.095,77.953) 224.879,79.178 ; 225.708,44.232 ccw(c225.946,44.996) 225.779,44.213 ; 226.695,79.197 227.432,79.197 ; 227.711,44.196 228.219,44.196 ; 229.235,79.197 229.972,79.197 ; 230.251,44.196 230.759,44.196 ; 231.775,79.197 232.512,79.197 ; 232.791,44.196 233.299,44.196 ; 234.315,79.197 235.052,79.197 ; 235.331,44.196 235.839,44.196 ; 236.855,79.197 237.592,79.197 ; 237.871,44.196 238.379,44.196 ; 239.573,79.197 244.78,79.197 ; 240.538,44.196 243.459,44.196 ; 246.634,78.486 247.371,78.486 ; 249.174,78.486 249.936,78.486 ; 251.714,78.486 252.451,78.486 ; 252.984,44.196 267.995,44.196 ccw(c267.983,45.453) 269.24,45.466 269.24,52.324 ; 254.254,78.486 254.991,78.486 256.266,78.486 256.978,79.197 267.995,79.197 cw(c267.995,77.953) 269.24,77.953 269.24,71.882 ; 269.24,61.214 269.24,62.865
  lines w0.254: 255.546,50.964 cw(c256.946,50.697) 258.316,51.094

## Silkscreen, mask and mechanical layers (free items; w line width, h text height)
Top Overlay:
  lines w0.254: 246.812,69.571 246.812,54.635 249.911,51.537 253.746,51.537
Bottom Overlay:
  text "Accessory template" at 165.319,125.059 h1.52 r90
  text "5V  TX   RX CTS RTS G" at 242.341,76.86 h1.52
  text "PC4" at 230.403,70.129 h1.52
  text "PB0" at 234.163,67.793 h1.52
  text "PX4FLOW v2.0" at 264.414,66.954 h1.52
  text "PA7" at 238.119,66.292 h1.52
  text "PB1" at 233.909,63.703 h1.52
  text "PC5" at 236.449,61.189 h1.52
  text "PA0" at 231.343,59.563 h1.52
  text "PC2" at 238.735,57.912 h1.52
  text "PE10" at 234.823,57.201 h1.52
  text "PD10" at 235.306,55.347 h1.52
  text "NC / . / . / PWM / . / . / AN / . / . / RX / . / . / TX / . / . / 5V / . / . / G" at 236.855,55.042 h1.52
  text "PC1" at 229.972,54.559 h1.52
  text "5V  RX   TX RTS CTS G" at 242.976,44.348 h1.52
  text "5V    H     L    G" at 259.74,43.612 h1.52
Dimension:
  lines w0.01: 223.85,49.606 223.85,53.746 224.638,54.534 224.638,71.857 223.85,72.644 223.85,77.953 cw(c225.095,77.953) 225.095,79.197 244.78,79.197 244.856,79.121 245.491,78.486 256.264,78.486 256.805,79.027 256.975,79.197 267.995,79.197 cw(c267.995,77.953) 269.24,77.953 269.24,45.466 cw(c267.983,45.453) 267.995,44.196 225.933,44.196 cw(c225.946,44.996) 225.146,45.009 225.146,48.362 ccw(c223.901,48.362) 223.901,49.606 223.85,49.606 ; 254,49.225 254.914,48.311 258.877,48.311 259.842,49.276 259.842,52.451 258.572,52.451 258.572,49.886 258.039,49.352 255.702,49.352 255.27,49.784 255.27,52.451 254,52.451 254,49.225
tDocu:
  drawing of 309 lines, arcs and shapes, not listed
  text "Layer" at 225.311,146.909 h1.52
  text "Name" at 231.689,146.909 h1.52
  text "Material" at 244.02,146.909 h1.52
  text "Thickness" at 255.105,146.909 h1.52
  text "Constant" at 264.208,146.909 h1.52
  text "Board Layer Stack" at 272.635,146.909 h1.52
  text "1" at 225.311,143.861 h1.52
  text "Top Overlay" at 231.689,143.861 h1.52
  text "2" at 225.311,140.813 h1.52
  text "Top Solder" at 231.689,140.813 h1.52
  text "Solder Resist" at 244.02,140.813 h1.52
  text "0.010mm" at 255.105,140.813 h1.52
  text "3.5" at 264.208,140.813 h1.52
  text "3" at 225.311,137.765 h1.52
  text "Top" at 231.689,137.765 h1.52
  text "Copper" at 244.02,137.765 h1.52
  text "0.035mm" at 255.105,137.765 h1.52
  text "4" at 225.311,134.717 h1.52
  text "Dielectric 1" at 231.689,134.717 h1.52
  text "FR-4" at 244.02,134.717 h1.52
  text "0.500mm" at 255.105,134.717 h1.52
  text "4.8" at 264.208,134.717 h1.52
  text "5" at 225.311,131.669 h1.52
  text "Signal Layer 1" at 231.689,131.669 h1.52
  text "Copper" at 244.02,131.669 h1.52
  text "0.036mm" at 255.105,131.669 h1.52
  text "6" at 225.311,128.621 h1.52
  text "Dielectric 5" at 231.689,128.621 h1.52
  text "0.127mm" at 255.105,128.621 h1.52
  text "4.2" at 264.208,128.621 h1.52
  text "7" at 225.311,125.573 h1.52
  text "Signal Layer 2" at 231.689,125.573 h1.52
  text "Copper" at 244.02,125.573 h1.52
  text "0.036mm" at 255.105,125.573 h1.52
  text "8" at 225.311,122.525 h1.52
  text "Dielectric 4" at 231.689,122.525 h1.52
  text "0.254mm" at 255.105,122.525 h1.52
  text "4.2" at 264.208,122.525 h1.52
  text "9" at 225.311,119.477 h1.52
  text "Route2" at 231.689,119.477 h1.52
  text "Copper" at 244.02,119.477 h1.52
  text "0.035mm" at 255.105,119.477 h1.52
  text "10" at 225.311,116.429 h1.52
  text "Dielectric 2" at 231.689,116.429 h1.52
  text "FR-4" at 244.02,116.429 h1.52
  text "0.127mm" at 255.105,116.429 h1.52
  text "4.2" at 264.208,116.429 h1.52
  text "11" at 225.311,113.381 h1.52
  text "Route15" at 231.689,113.381 h1.52
  text "Copper" at 244.02,113.381 h1.52
  text "0.035mm" at 255.105,113.381 h1.52
  text "12" at 225.311,110.333 h1.52
  text "Dielectric 3" at 231.689,110.333 h1.52
  text "FR-4" at 244.02,110.333 h1.52
  text "0.254mm" at 255.105,110.333 h1.52
  text "4.2" at 264.208,110.333 h1.52
  text "13" at 225.311,107.285 h1.52
  text "Bottom" at 231.689,107.285 h1.52
  text "Copper" at 244.02,107.285 h1.52
  text "0.035mm" at 255.105,107.285 h1.52
  text "14" at 225.311,104.237 h1.52
  text "Bottom Solder" at 231.689,104.237 h1.52
  text "Solder Resist" at 244.02,104.237 h1.52
  text "0.010mm" at 255.105,104.237 h1.52
  text "3.5" at 264.208,104.237 h1.52
  text "15" at 225.311,101.189 h1.52
  text "Bottom Overlay" at 231.689,101.189 h1.52
  text "Amber Mask white silk" at 248.488,95.86 h1.52

## Text inside footprints (layer, text, board x,y; h text height)
J4: tDocu "BW" at 227.122,71.349 h1.52 r180.02; tDocu "GND" at 227.822,56.086 h1.52 r180.02; tDocu "VDD" at 227.822,58.626 h1.52 r180.02; tDocu "PW" at 227.122,68.786 h1.52 r180.02; tDocu "AN" at 227.122,66.246 h1.52 r180.02; tDocu "RX" at 227.122,63.706 h1.52 r180.02; tDocu "TX" at 227.122,61.166 h1.52 r180.02
U405: Top Overlay "Z" at 243.357,67.818 h1.52; Top Overlay "Y" at 243.205,71.45 h1.52; Top Overlay "X" at 245.77,67.793 h1.52
U$5: Top Overlay "1" at 255.346,64.11 h1.52 r90